# Altium PCB archive_vfd.PcbDoc
Units mil, origin at the board's own origin, x right, y up, seen from the top; angles counter-clockwise.
Board outline 6000 x 4000 mil, 2 copper layers (Top Layer, Bottom Layer); 27 components, 0 nets, 94 pads, 0 vias.
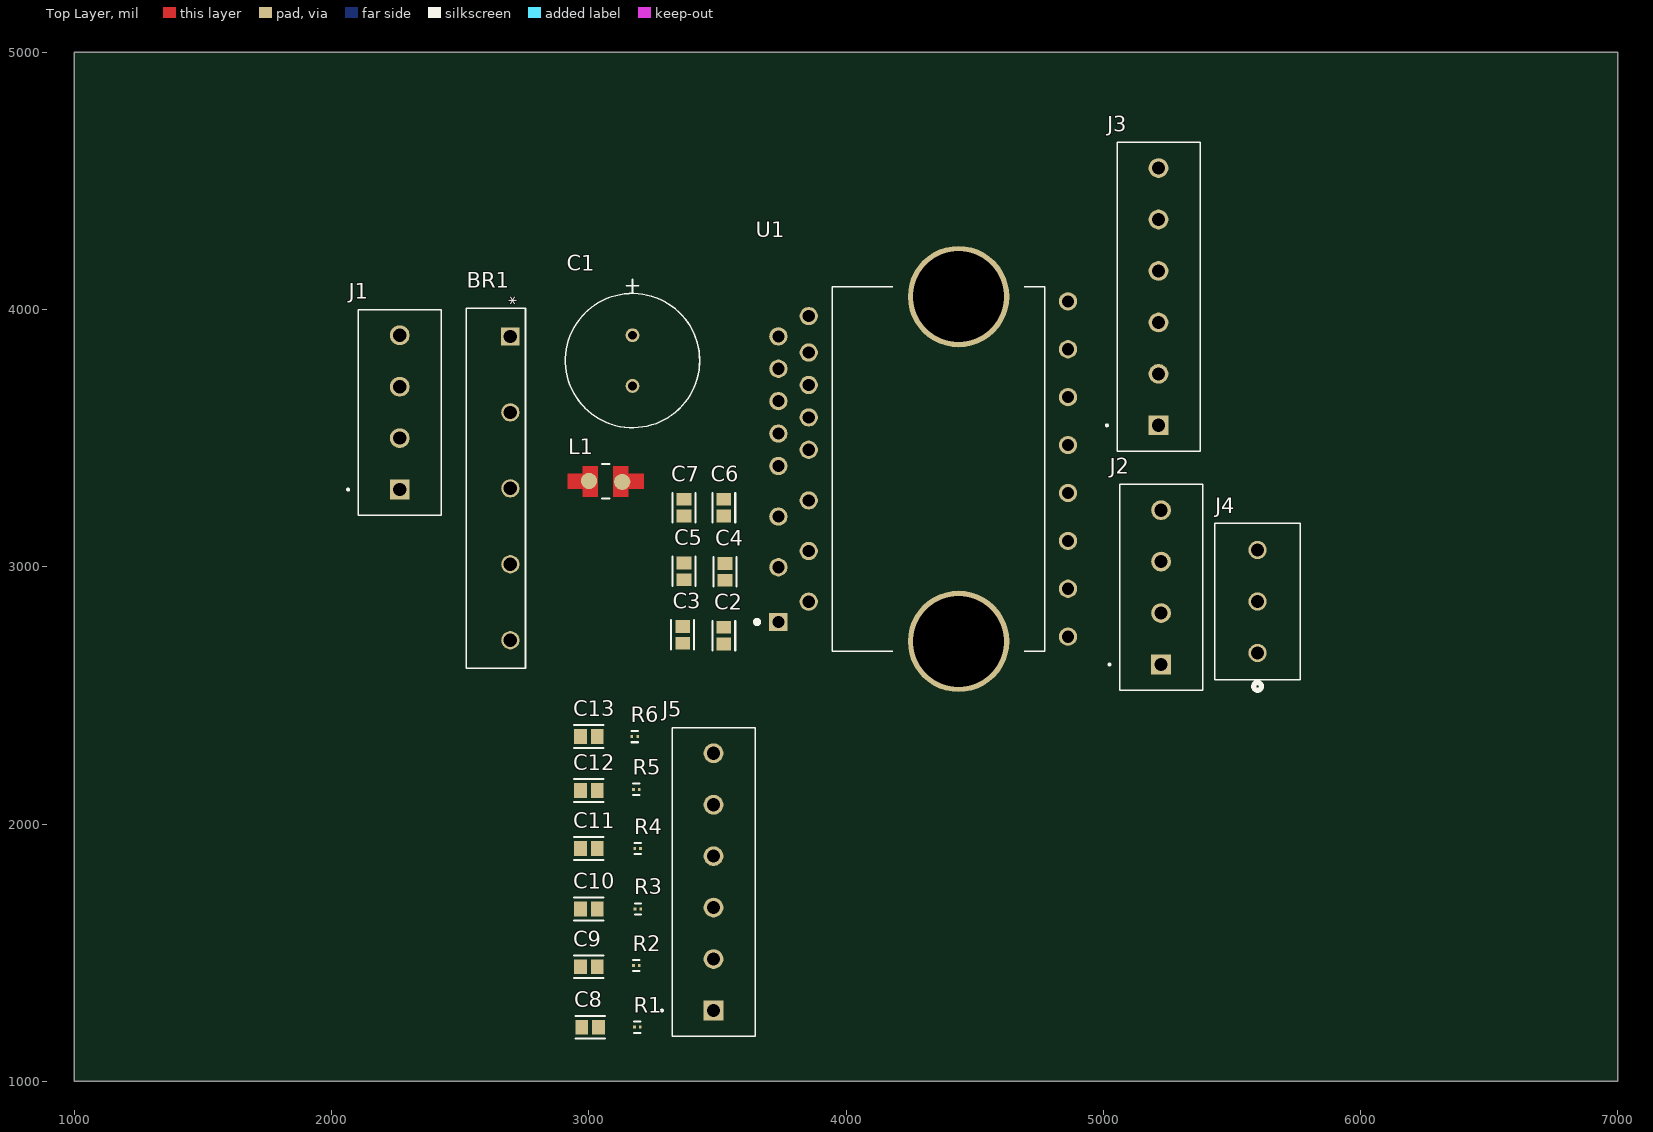
[diagram p0: Top Layer view]
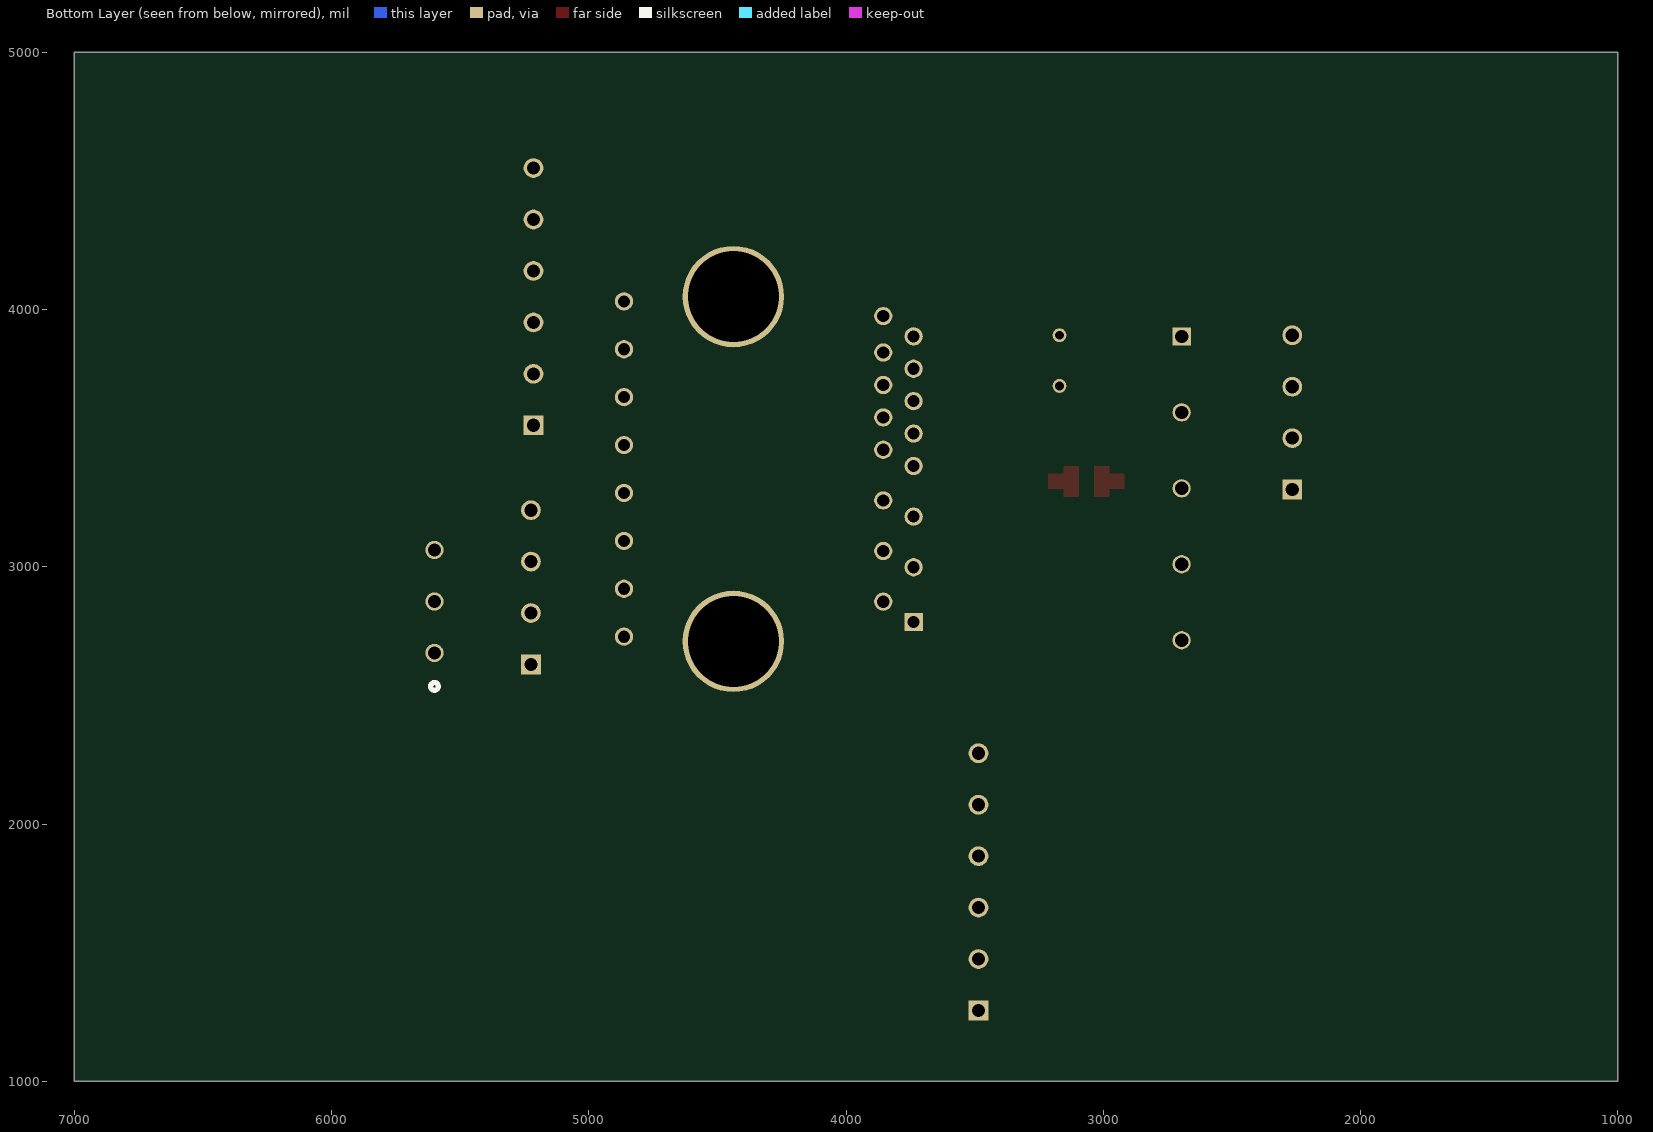
[diagram p1: Bottom Layer view, seen from below]

## Layer stack, top to bottom
Top Solder: solder mask 0.4, Solder Resist, Dk 3.5
Top Layer: signal copper 1.4
Dielectric 1: dielectric 12.6, FR-4, Dk 4.8
Bottom Layer: signal copper 1.4
Bottom Solder: solder mask 0.4, Solder Resist, Dk 3.5

## Board outline
1000,1000 7000,1000 7000,5000 1000,5000

## Design rules (kind name [scope] priority, off if disabled: settings)
Clearance [All] p1: gap=10 ignorepadtopadclearanceinfootprint=FALSE
PolygonConnect [All] p1: connectstyle=Relief reliefconductorwidth=10 reliefentries=4 polygonreliefangle="90 Angle" airgapwidth=10
RoutingVias [All] p1: holewidth=28 width=50 viastyle="Through Hole" minholewidth=28 minwidth=50 maxholewidth=28 maxwidth=50
SolderMaskExpansion [All] p1: expansion=4 istentingtop=FALSE
Width [All] p1: maxlimit=10 minlimit=10 preferedwidth=10
30 further rules are at their usual default settings.

## Components (designator, comment, footprint, x,y, rotation, side; value= is the part's Value field where it differs from the comment)
BR1 "GUO40-12NO1" SIP5-GUFP_LTF 2695,3895.55 r270 top
C1 "22 µF" CAP_BX_12P5x20_RUB 3170,3900 r270 top
C2 "1 µF" FP-CL21-IPC_B 3525,2732.49 r90 top
C3 "1 µF" FP-CL21-IPC_B 3365,2735 r90 top
C4 "1 µF" FP-CL21-IPC_B 3530,2980 r90 top
C5 "1 µF" FP-CL21-IPC_B 3370,2982.49 r90 top
C6 "1 µF" FP-CL21-IPC_B 3525,3230 r90 top
C7 "1 µF" FP-CL21-IPC_B 3370,3230 r90 top
C8 "1 µF" FP-CL21-IPC_B 3005,1210 r0 top
C9 "1 µF" FP-CL21-IPC_B 3000,1445 r0 top
C10 "1 µF" FP-CL21-IPC_B 3000,1670 r0 top
C11 "1 µF" FP-CL21-IPC_B 3000,1905 r0 top
C12 "1 µF" FP-CL21-IPC_B 3000,2130 r0 top
C13 "1 µF" FP-CL21-IPC_B 3000,2340 r0 top
J1 "TB006_-508-04BE" "CUI_TB006 -508-04BE" 2265,3300 r90 top
J2 "TB006_-508-04BE" "CUI_TB006 -508-04BE" 5225,2620 r90 top
J3 "TB006-508-06BE" CUI_TB006-508-06BE 5215,3550 r90 top
J4 "TB006-508-03BE" CONN3_TB006-508_CUD 5600,2665 r90 top
J5 "TB006-508-06BE" CUI_TB006-508-06BE 3485,1275 r90 top
L1 "30 mH" FP-LQH43CN_03-MFG 3065.41,3331.85 r0 top
R1 "22 Ω" FP-MCR006-MFG 3188.78,1210 r0 top
R2 "22 Ω" FP-MCR006-MFG 3185,1450 r0 top
R3 "22 Ω" FP-MCR006-MFG 3191.22,1670 r0 top
R4 "22 Ω" FP-MCR006-MFG 3190,1905 r0 top
R5 "22 Ω" FP-MCR006-MFG 3185,2135 r0 top
R6 "22 Ω" FP-MCR006-MFG 3178.78,2340 r0 top
U1 "IKCM30F60GDXKMA1" IC_IKCM30F60GDXKMA1 4300,3380 r90 top

## Footprints (in the part's own frame and the unit in brackets; to place one, negate y for a bottom-side part, rotate by r counter-clockwise, add the part's x,y. Pads: shape width x height; smd on the part's side, far side on the other; paste and mask are expansions set on the pad)
CAP_BX_12P5x20_RUB [mil]
  round 54 / inner round 60 / far side round 54 hole 34 paste-99999 mask+0: 1(0,0) 2(196.85,0)
  silkscreen extent -218,-261 359,261, body extent -158,-255 356,255, height 867
CONN3_TB006-508_CUD [mil]
  round 71 / inner round 60 / far side round 71 hole 51 paste-99999 mask+0: 1(0,0) 2(200,0) 3(400,0)
  silkscreen extent -145,-166 505,167
"CUI_TB006 -508-04BE" [mm]
  rect 1.95x1.95 / inner round 1.95 / far side rect 1.95x1.95 hole 1.3: 1(0,0)
  round 1.95 hole 1.3: 2(5.08,0) 3(10.16,0) 4(15.24,0)
  silkscreen extent -2.54,-4.1 17.78,5.2
CUI_TB006-508-06BE [mm]
  rect 1.95x1.95 / inner round 1.95 / far side rect 1.95x1.95 hole 1.3: 1(0,0)
  round 1.95 hole 1.3: 2(5.08,0) 3(10.16,0) 4(15.24,0) 5(20.32,0) 6(25.4,0)
  silkscreen extent -2.54,-4.1 27.94,5.2
FP-CL21-IPC_B [mil]
  rect 49.4x57.33 smd paste+0 mask+0: 1(-32.51,0) 2(32.51,0)
  silkscreen extent -57,-44 57,44, body extent -67,-39 67,39, height 10
FP-LQH43CN_03-MFG [mil]
  round 63.12 smd paste+0 mask+0: 1(-64.59,1.85) 2(64.59,-1.85)
  Top Layer region: -147.64,29.53 -88.58,29.53 -88.58,59.06 -29.53,59.06 -29.53,-59.06 -88.58,-59.06 -88.58,-29.53 -147.64,-29.53 -147.64,29.53
  Top Layer region: 147.64,29.53 88.58,29.53 88.58,59.06 29.53,59.06 29.53,-59.06 88.58,-59.06 88.58,-29.53 147.64,-29.53 147.64,29.53
  silkscreen extent -15,-67 15,67, body extent -152,-71 152,71, height 10
FP-MCR006-MFG [mm]
  rect 0.27x0.3 smd paste+0 mask+0: 1(-0.285,0) 2(0.285,0)
  silkscreen extent -0.32,-0.57 0.32,0.55, body extent -0.52,-0.27 0.52,0.27, height 0.25
IC_IKCM30F60GDXKMA1 [mm]
  rect 1.8x1.8 / inner round 1.8 / far side rect 1.8x1.8 hole 1.2: 1(-15.1,14.3)
  round 1.8 hole 1.2: 2(-13.1,11.3) 3(-9.7,14.3) 4(-8.1,11.3) 5(-4.7,14.3) 6(-3.1,11.3) 7(0.3,14.3) 8(1.9,11.3) 9(3.5,14.3) 10(5.1,11.3) 11(6.7,14.3) 12(8.3,11.3) 13(9.9,14.3) 14(11.5,11.3) 15(13.1,14.3) 16(15.1,11.3) 17(16.555,-14.3) 18(11.825,-14.3) 19(7.095,-14.3) 20(2.365,-14.3) 21(-2.365,-14.3) 22(-7.095,-14.3) 23(-11.825,-14.3) 24(-16.555,-14.3)
  round 10.016 hole 9 mask+0: 25(-17.025,-3.5) 26(17.025,-3.5)
  silkscreen extent -18,-12 18,16.6, body extent -18,-14.55 18,14.55, height 5.6
SIP5-GUFP_LTF [mil]
  rect 71x71 / inner round 60 / far side rect 71x71 hole 51 paste-99999 mask+0: 1(0,0)
  round 71 / inner round 60 / far side round 71 hole 51 paste-99999 mask+0: 2(295.28,0) 3(590.55,0) 4(885.83,0) 5(1181.1,0)
  silkscreen extent -109,-171 1291,59, body extent -104,-110 1286,110, height 1142

## Part data
BR1: "No Description Available", Mfr_Name="Littelfuse Inc", RefDes=RefDes, Type=Type
C1: library part 450BXW22MEFR12.5X20, "No Description Available", Mfr_Name=Rubycon
C2 C3 C4 C5 C6 C7 C8 C9 C10 C11 C12 C13: library part CMP-13271-002018-1, "CL21 Series 0805 1uF 25V -20/+80% Tolerance Y5V Multilayer Ceramic Chip Capacitor", Capacitance=1uF, Case/Package=0805, Dielectric=Y5V, Max Operating Temperature=85°C, Min Operating Temperature=-30°C, Package Quantity=10000, Tolerance=80%, Voltage Rating=25V, Depth=1.25mm, Height=1.25mm, Length=2mm, Mount="Surface Mount", Packaging="Tape and Reel", Radiation Hardening=No, Thickness=0.053inch, Voltage Rating (DC)=25V, Width=0.049inch
J1 J2 J3 J5: "2~24 Poles, Screw Type, Horizontal, 5.08 Pitch, 26~14 (AWG), Terminal Block Connector", Package=None, CUI_purchase_URL=https://www.cuidevices.com/product/interconnect/connectors/terminal-blocks/tb006-508-series?utm_source=snapeda.com&utm_medium=referral&utm_campaign=snapedaBOM, MF="CUI Devices"
  J1 J2: Availability="In Stock", Check_prices=https://www.snapeda.com/parts/TB006%20-508-04BE/CUI+Devices/view-part/?ref=eda, MP="TB006 -508-04BE", Price=None, Purchase-URL="https://pricing.snapeda.com/search/part/TB006 -508-04BE/?ref=eda", SnapEDA_Link=https://www.snapeda.com/parts/TB006%20-508-04BE/CUI+Devices/view-part/?ref=snap
  J3 J5: Check_prices=https://www.snapeda.com/parts/TB006-508-06BE/CUI+Devices/view-part/?ref=eda, Digi-Key_Part_Number=102-6195-ND, MP=TB006-508-06BE, Purchase-URL=https://pricing.snapeda.com/search/part/TB006-508-06BE/?ref=eda, SnapEDA_Link=https://www.snapeda.com/parts/TB006-508-06BE/CUI+Devices/view-part/?ref=snap
J4: "No Description Available", Mfr_Name="Same Sky", RefDes=RefDes, Type="Wire to Board"
L1: library part CMP-06042-005793-1, "Wire Wound Ferrite Inductor for General Circuits 220μH ±10% 5.4Ω 110mA 1812", Case Code (Imperial)=1812, Case Code (Metric)=4532, Current=220mA, Current Rating=110mA, DC Resistance (DCR)=5.4R, Frequency=4.5MHz, Inductance=220uH, Inductance Tolerance=10%, Max Operating Temperature=85°C, Min Operating Temperature=-40°C, Package Quantity=500, Test Frequency=1MHz, Case/Package=1812, Core Material=Ferrite, DC Current=110mA, Depth=3.4mm, Height=2.6mm, Lead Free="Lead Free", Length=4.5mm, Max DC Current=110mA, Military Standard=Not, Mount="Surface Mount", Packaging="Tape and Reel", Q Factor=40, Radiation Hardening=No, REACH SVHC="No SVHC", Self Resonant Frequency=4.5MHz, Series Resistance=5.4R, Shielding=Unshielded, Termination=SMD/SMT, Tolerance=10%, Weight=0.004586oz, Width=3.2mm
R1 R2 R3 R4 R5 R6: library part CMP-08839-021281-1, "Thick Film Chip Resistor, 0201, 22Ω, 5%, 200ppm/°C, 0.05W, 25V", Case Code (Imperial)=0201, Case Code (Metric)=0603, Max Operating Temperature=125°C, Max Power Dissipation=50mW, Min Operating Temperature=-55°C, Package Quantity=1, Resistance=22R, Resistor Type="Thick Film", Temperature Coefficient=250ppm/°C, Tolerance=5%, Voltage Rating (DC)=25V, Case/Package=0201, Height=0.01inch, Length=0.024inch, Number of Terminations=2, Packaging="Tape and Reel", RoHS Compliant=Yes, Series=MCR, Width=0.012inch
U1: "Fully isolated Dual In-Line molded module", Package="PowerDIP-24 Infineon", Availability="In Stock", Check_prices=https://www.snapeda.com/parts/IKCM30F60GDXKMA1/Infineon+Technologies/view-part/?ref=eda, MF="Infineon Technologies", MP=IKCM30F60GDXKMA1, Price=None, Purchase-URL=https://pricing.snapeda.com/search?q=IKCM30F60GDXKMA1&ref=eda, SnapEDA_Link=https://www.snapeda.com/parts/IKCM30F60GDXKMA1/Infineon+Technologies/view-part/?ref=snap

## Nets (pads, with @x,y where several pads share a name; then routed paths per layer and width w, separated by ;. In a path a pad name is that pad's centre, name@x,y a point inside that pad or via, vN(x,y) a via of type N, cw(c..) or ccw(c..) an arc to the next point about the centre after c; other vN are vias at no path point)
pads on no net: BR1.1 BR1.2 BR1.3 BR1.4 BR1.5 C1.1 C1.2 C2.1 C2.2 C3.1 C3.2 C4.1 C4.2 C5.1 C5.2 C6.1 C6.2 C7.1 C7.2 C8.1 C8.2 C9.1 C9.2 C10.1 C10.2 C11.1 C11.2 C12.1 C12.2 C13.1 C13.2 J1.1 J1.2 J1.3 J1.4 J2.1 J2.2 J2.3 J2.4 J3.1 J3.2 J3.3 J3.4 J3.5 J3.6 J4.1 J4.2 J4.3 J5.1 J5.2 J5.3 J5.4 J5.5 J5.6 L1.1 L1.2 R1.1 R1.2 R2.1 R2.2 R3.1 R3.2 R4.1 R4.2 R5.1 R5.2 R6.1 R6.2 U1.1 U1.2 U1.3 U1.4 U1.5 U1.6 U1.7 U1.8 U1.9 U1.10 U1.11 U1.12 U1.13 U1.14 U1.15 U1.16 U1.17 U1.18 U1.19 U1.20 U1.21 U1.22 U1.23 U1.24 U1.25 U1.26

## Text inside footprints (layer, text, board x,y; h text height)
BR1: Mechanical 13 "*" at 2670,4002.5 h50 r270; Top Overlay "*" at 2670,4052.5 h50 r270